# EAGLE board samd21g_board (EAGLE 9.6.2)
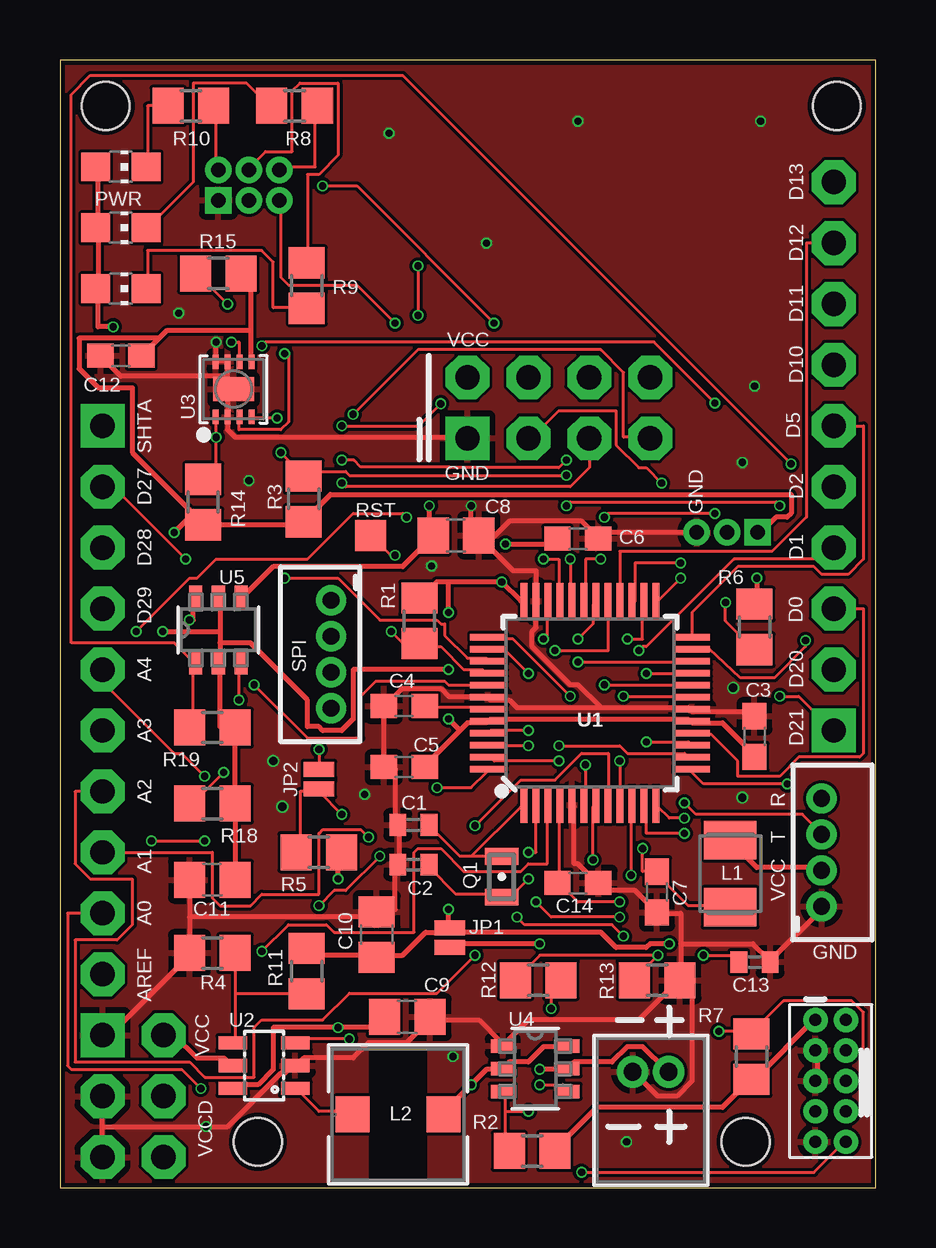
[diagram p0: board, top side]
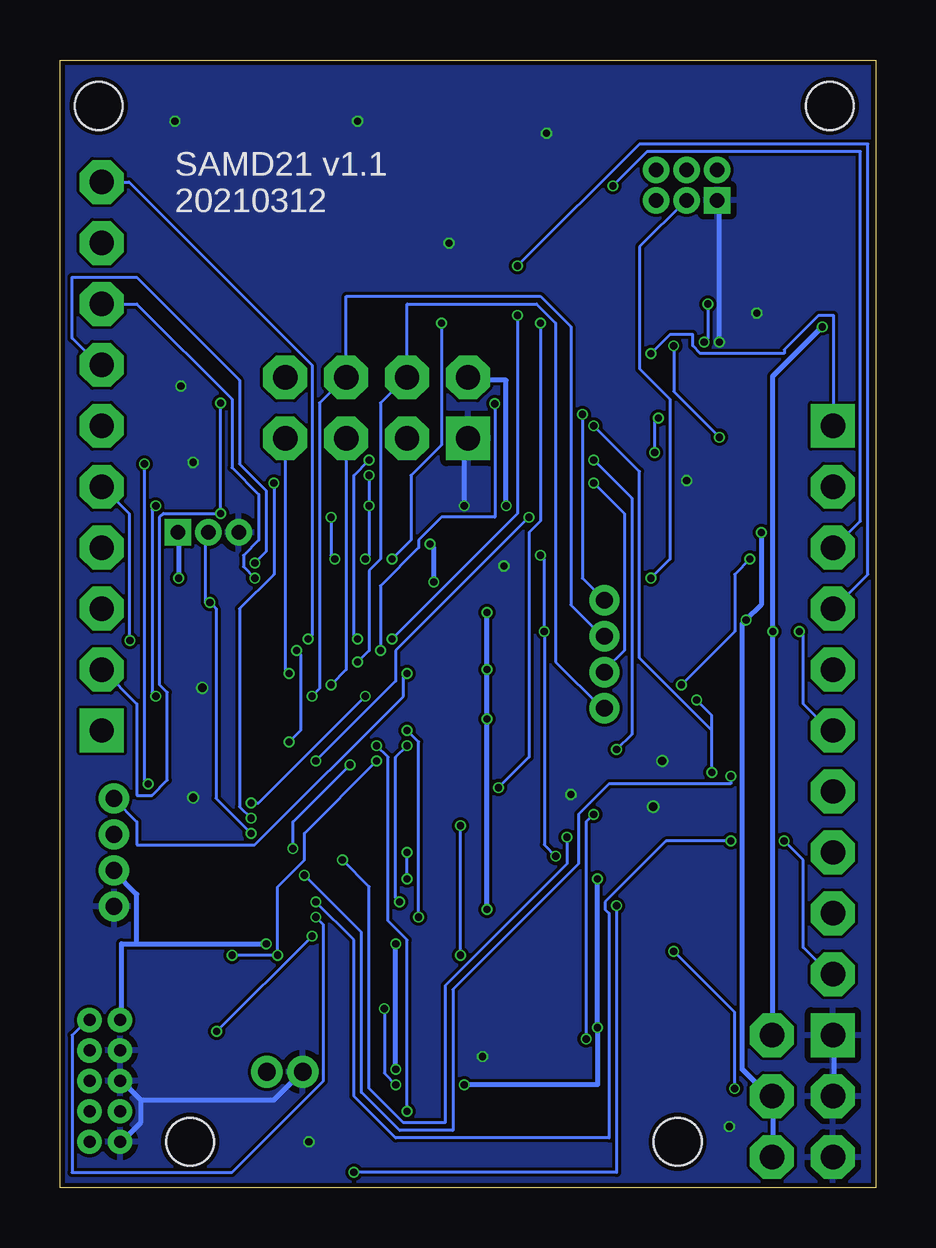
[diagram p1: board, bottom side, seen from below]

Size 34 x 47 mm. Coordinates in mm from the lower left corner, seen from the top.
Outline: 0,0 34,0 34,47 0,47 0,0
Copper layers (1*16): Top 0.035mm / dielectric 1.6mm / Bottom 0.035mm
Design rules "jlcpcb-2layers": minimum track width 5mil, minimum drill 0.3mm, track to track 5mil, track to pad 5mil, pad to pad 5mil, via to via 5mil, smd to smd 5mil, copper to edge 0.2mm, drill to drill 6mil, minimum pad ring 10mil, minimum via ring 3mil, stop-mask expansion 4mil, vias tented up to drill 0mil, thermal gap 10mil
Net classes: 1 vcc: width 0.203 mm
Holes 2 mm at 28.57,1.91 1.91,45.09 32.38,45.09 8.26,1.91
vRestrict: area 16.5,16.6 to 18.7,23.6; area 18.5,14.6 to 25.7,16.6; area 25.7,16.6 to 27.8,23.7; area 18.7,23.6 to 25.5,25.9; area 24.8,16.4 to 25.9,24.1; area 18.5,23.1 to 25.8,24; area 18.4,16.6 to 19.2,23.9; area 18.7,16.6 to 25.8,17.3; area 10.2,18.5 to 12.6,25.8; area 30.6,10.4 to 32.9,17.5; area 30.4,1.3 to 33.9,7.6; area 22.4,3.6 to 26.9,6.1; 6 more areas

## Footprints (pad centres in the part's own frame; a part is rotated, then mirrored left to right if it is on the bottom)
C0402 = smd 0.7 x 0.9: 1 -0.65,0; 2 0.65,0
C0603 = smd 1.1 x 1: 1 -0.85,0; 2 0.85,0
C0805 = smd 1.3 x 1.5: 1 -0.95,0; 2 0.95,0
2X5-PTH-1.27MM = drill 0.508 pad 1: 1 -2.54,-0.635; 2 -2.54,0.635; 3 -1.27,-0.635; 4 -1.27,0.635; 5 0,-0.635; 6 0,0.635; 7 1.27,-0.635; 8 1.27,0.635; 9 2.54,-0.635; 10 2.54,0.635
M_2R03_50MIL-V2 = drill 0.6 pad 1.05 square: 1 -1.27,-0.635 | drill 0.6 pad 1.05: 2 -1.27,0.635; 3 0,-0.635; 4 0,0.635; 5 1.27,-0.635; 6 1.27,0.635
2X04 = drill 1.016 square: 1 -3.81,-1.27 | drill 1.016 octagon: 2 -3.81,1.27; 3 -1.27,-1.27; 4 -1.27,1.27; 5 1.27,-1.27; 6 1.27,1.27; 7 3.81,-1.27; 8 3.81,1.27
M_1R03_50MIL-V = drill 0.6 pad 1.05 square: 1 -1.27,0 | drill 0.6 pad 1.05: 2 0,0; 3 1.27,0
B4B-ZR = drill 0.7 pad 1.1: 1 -2.25,0; 2 -0.75,0; 3 0.75,0; 4 2.25,0
2X03 = drill 1.016 square: 1 -2.54,-1.27 | drill 1.016 octagon: 2 -2.54,1.27; 3 0,-1.27; 4 0,1.27; 5 2.54,-1.27; 6 2.54,1.27
CONN_S2B-ZR_JST = drill 0.737 pad 1.245: 1 0,0; 2 1.499,0
SMT-JUMPER_2_NO_NO-SILK = smd 0.635 x 1.27: 1 -0.406,0; 2 0.406,0
1X10-S = drill 1.016 square: 1 -11.43,0 | drill 1.016 octagon: 2 -8.89,0; 3 -6.35,0; 4 -3.81,0; 5 -1.27,0; 6 1.27,0; 7 3.81,0; 8 6.35,0; 9 8.89,0; 10 11.43,0
L3225M = smd 1.6 x 2.2: 1 -1.4,0; 2 1.4,0
IND_CDRH3D16-4R7NC_SUM = smd 1.41 x 1.499: 1 -1.899,0; 2 1.899,0
CHIP-LED0805 = smd 1.2 x 1.2: A 0,-1.05; C 0,1.05
FC-12M = smd 0.7 x 1.4: 1 -0.85,0; 2 0.85,0
R0805 = smd 1.3 x 1.5: 1 -0.95,0; 2 0.95,0
TP13SQ = smd 1.3 x 1.3: TP 0,0
TQFP-48 = smd 1.5 x 0.28: 1 -4.25,2.75; 2 -4.25,2.25; 3 -4.25,1.75; 4 -4.25,1.25; 5 -4.25,0.75; 6 -4.25,0.25; 7 -4.25,-0.25; 8 -4.25,-0.75; 9 -4.25,-1.25; 10 -4.25,-1.75; 11 -4.25,-2.25; 12 -4.25,-2.75; 25 4.25,-2.75; 26 4.25,-2.25; 27 4.25,-1.75; 28 4.25,-1.25; 29 4.25,-0.75; 30 4.25,-0.25; 31 4.25,0.25; 32 4.25,0.75; 33 4.25,1.25; 34 4.25,1.75; 35 4.25,2.25; 36 4.25,2.75 | smd 0.28 x 1.5: 13 -2.75,-4.25; 14 -2.25,-4.25; 15 -1.75,-4.25; 16 -1.25,-4.25; 17 -0.75,-4.25; 18 -0.25,-4.25; 19 0.25,-4.25; 20 0.75,-4.25; 21 1.25,-4.25; 22 1.75,-4.25; 23 2.25,-4.25; 24 2.75,-4.25; 37 2.75,4.25; 38 2.25,4.25; 39 1.75,4.25; 40 1.25,4.25; 41 0.75,4.25; 42 0.25,4.25; 43 -0.25,4.25; 44 -0.75,4.25; 45 -1.25,4.25; 46 -1.75,4.25; 47 -2.25,4.25; 48 -2.75,4.25
SOT-23-6 = smd 0.55 x 1.2: 1 -0.95,-1.3; 2 0,-1.3; 3 0.95,-1.3; 4 0.95,1.3; 5 0,1.3; 6 -0.95,1.3
SHT3X_DFN8 = smd 0.6 x 0.25: 1 -1.15,0.75; 2 -1.15,0.25; 3 -1.15,-0.25; 4 -1.15,-0.75; 5 1.15,-0.75; 6 1.15,-0.25; 7 1.15,0.25; 8 1.15,0.75 | smd 1 x 1.7: THERMAL 0,0
TSOT23-6_419BL_ONS = smd 0.998 x 0.558: 1 -1.35,0.95; 2 -1.35,0; 3 -1.35,-0.95; 4 1.35,-0.95; 5 1.35,0; 6 1.35,0.95

## Placement (x,y rotation side)
C1  15pF  [C0402]  14.73,15.11 0 top
C2  15pF  [C0402]  14.73,13.46 0 top
C3  100nF  [C0603]  28.96,18.8 270 top
C4  100nF  [C0603]  14.35,20.07 0 top
C5  100nF  [C0603]  14.35,17.53 0 top
C6  100nF  [C0603]  21.59,27.05 180 top
C7  100nF  [C0603]  24.89,12.32 90 top
C8  10uF  [C0805]  16.51,27.18 180 top
C9  4.7uF  [C0805]  14.48,7.11 180 top
C10  10uF  [C0805]  13.21,10.54 90 top
C11  10uF  [C0805]  6.35,12.83 180 top
C12  100nF  [C0603]  2.54,34.67 180 top
C13  20pF  [C0402]  28.96,9.4 180 top
C14  100nF  [C0603]  21.59,12.7 180 top
H_CORTEX  CORTEX_JTAG_DEBUG_PTH  [2X5-PTH-1.27MM]  32.13,4.45 270 top
H_LEDS  [M_2R03_50MIL-V2]  7.87,41.78 0 top
H_NRF24  [2X04]  20.8,32.5 0 top
H_ONEWIRE  [M_1R03_50MIL-V]  27.81,27.3 180 top
H_SERIAL  B4B-ZR  [B4B-ZR]  31.75,13.97 90 top
H_SPI  B4B-ZR  [B4B-ZR]  11.3,22.23 270 top
H_VCC  [2X03]  3.05,3.81 270 top
H_VCC_INPUT  S2B-ZR  [CONN_S2B-ZR_JST]  23.88,4.83 0 top
JP1  JUMPER-SMT_2_NO_NO-SILK  [SMT-JUMPER_2_NO_NO-SILK]  16.26,10.41 90 top
JP2  JUMPER-SMT_2_NO_NO-SILK  [SMT-JUMPER_2_NO_NO-SILK]  10.79,17.02 90 top
JP3  [1X10-S]  32.26,30.48 90 top
JP4  [1X10-S]  1.78,20.32 270 top
L1  30R  [L3225M]  27.94,13.08 270 top
L2  4.7uH  [IND_CDRH3D16-4R7NC_SUM]  14.1,3.05 0 top
LED1  [CHIP-LED0805]  2.54,40.01 270 top
LED2  [CHIP-LED0805]  2.54,37.47 270 top
LED3  [CHIP-LED0805]  2.54,42.55 270 top
Q1  FC-12M  [FC-12M]  18.41,12.95 90 top
R1  10k  [R0805]  14.99,23.62 90 top
R2  1M  [R0805]  19.68,1.52 180 top
R3  10k  [R0805]  10.16,28.7 270 top
R4  1M  [R0805]  6.35,9.78 0 top
R5  1M  [R0805]  10.79,13.97 180 top
R6  4.7k  [R0805]  28.96,23.37 270 top
R7  1k  [R0805]  28.83,5.46 90 top
R8  10k  [R0805]  9.78,45.09 0 top
R9  10k  [R0805]  10.29,37.59 90 top
R10  10k  [R0805]  5.46,45.09 0 top
R11  1.5M  [R0805]  10.29,9.02 90 top
R12  100k  [R0805]  19.94,8.64 0 top
R13  100k  [R0805]  24.89,8.64 180 top
R14  10k  [R0805]  5.97,28.57 270 top
R15  10k  [R0805]  6.6,38.1 180 top
R18  10k  [R0805]  6.35,16 180 top
R19  10k  [R0805]  6.35,19.18 180 top
TP1  TPSQTP13SQ  [TP13SQ]  12.95,27.18 0 top
U1  ATSAMD21G-A  [TQFP-48]  22.1,20.19 90 top
U2  MCP16251/2  [SOT-23-6]  8.51,5.08 90 top
U3  SHT31/SHT35  [SHT3X_DFN8]  7.24,33.27 90 top
U4  FDC6306P  [TSOT23-6_419BL_ONS]  19.81,4.95 0 top
U5  FDC6306P  [TSOT23-6_419BL_ONS]  6.6,23.24 90 top

## Library data of the parts
C1 C2 = rcl; SOPL_MPN: GRM1555C1H150JA01D; SOPL_SKU: 302010041; SPICEPREFIX: C
C3-C7 C12 C14 = rcl; SOPL_MPN: CC0603KRX7R9BB104; SOPL_SKU: 302010138; SPICEPREFIX: C
C8 C10 C11 = rcl; SOPL_MPN: CC0805KKX5R8BB106; SOPL_SKU: 302010178; SPICEPREFIX: C
C9 C13 = rcl; SOPL_MPN: CC0805KKX5R8BB475; SOPL_SKU: 302010146; SPICEPREFIX: C
H_CORTEX = SparkFun-Connectors; SPICEPREFIX: X
H_LEDS H_NRF24 H_ONEWIRE H_VCC JP1-JP4 = common_used_objects
H_SERIAL H_SPI = con-jst; MF: FARNELL; MPN: B4B-ZR(LF)(SN); OC_FARNELL: 1830916; OC_NEWARK: 37K9960
H_VCC_INPUT = common_used_objects; BUILT_BY: EMA_Justin; COPYRIGHT: Copyright (C) 2018 Accelerated Designs. All rights reserved; DATASHEET: http://www.jst-mfg.com/product/pdf/eng/eZH.pdf; MANUFACTURER_PART_NUMBER: S2B-ZR(LF)(SN); SOURCELIBRARY: JST_2020-03-24; VENDOR: JST
L1 = rcl; SPICEPREFIX: L
L2 = common_used_objects; BUILT_BY: EMA_Cory; COPYRIGHT: Copyright (C) 2018 Accelerated Designs. All rights reserved; MANUFACTURER_PART_NUMBER: CDRH3D16/HPNP-4R7NC; SOPL_MPN: VLS201610HBX-4R7M-1; SOPL_SKU: 303010544; SOURCELIBRARY: Sumida_2020-01-16; VALUE_: 4.7uH; VENDOR: Sumida
LED1 = led; SOPL_MPN: 17-215SYGC/S530-E2/TR8; SOPL_SKU: 304090057
LED2 = led; SOPL_MPN: 17-215SURC/S530-A2/TR8; SOPL_SKU: 304090046
LED3 = led; SOPL_MPN: 17-215UYC/S530-A3/TR8; SOPL_SKU: 304090039
Q1 = crystal; SOPL_MPN: FC-12M; SOPL_SKU: 306010020
R1 R3 R8-R10 R14 R15 R18 R19 = rcl; SOPL_MPN: RC0805FR-0710KL; SOPL_SKU: 301010361; SPICEPREFIX: R
R2 R4 R5 R12 R13 = rcl; SOPL_MPN: RC0805FR-071ML; SOPL_SKU: 301012157; SPICEPREFIX: R
R6 = rcl; SOPL_MPN: RC0603FR-074K7L; SOPL_SKU: 301010195; SPICEPREFIX: R
R7 = rcl; SOPL_MPN: 301010311; SOPL_SKU: RC0805JR-071KL; SPICEPREFIX: R
R11 = rcl; SOPL_MPN: RC0805JR-071M5L; SPICEPREFIX: R; TME: SMD0805-1M5-1%
TP1 = testpad
U1 = common_used_objects; PROD_ID: IC-13064; SOPL_MPN: ATSAMD21G18A-MU; SOPL_SKU: 310010095
U2 = MCP16251-2
U3 = common_used_objects; SOPL_MPN: SHT35-DIS-B/SHT31-DIS-B
U4 U5 = common_used_objects; BUILT_BY: EMA_Cory; COPYRIGHT: Copyright (C) 2018 Accelerated Designs. All rights reserved; DATASHEET: https://www.onsemi.com/pub/Collateral/FDC6306P-D.pdf; MANUFACTURER_PART_NUMBER: FDC6306P; SOURCELIBRARY: Add_to_database_2020-12-23; VENDOR: ON Semiconductor

## Nets
A0: JP4.9 U1.3
A1: JP4.8 U1.7
A2: JP4.7 U1.8
A3: JP4.6 U1.9
A4: JP4.5 U1.10
A5_VBATT: C13.2 R12.1 R13.2 U1.47
AREF: C14.2 JP4.10 U1.4
D0: JP3.3 U1.16
D1: JP3.4 U1.15
D2: JP3.5 U1.23
D3_VBATT_EN: R2.2 U1.14 U4.3
D4_DEV_EN: R19.2 U1.13 U5.1
D5: JP3.6 U1.24
D6_NRF24_EN: R18.2 U1.29 U5.3
D7_BOOST_EN: JP2.2 U1.30
D8_ONEWIRE: H_ONEWIRE.2 R6.2 U1.11
D9_NRF_CE: H_NRF24.3 U1.12
D10: JP3.7 U1.27
D11: JP3.8 U1.25
D12: JP3.9 U1.28
D13: JP3.10 U1.26
D20_SDA: JP3.2 R14.1 U1.31 U3.1
D21_SCL: JP3.1 R3.1 U1.32 U3.4
D22_SPI_MISO: H_NRF24.7 H_SPI.1 U1.21
D23_SPI_MOSI: H_NRF24.6 H_SPI.2 U1.19
D24_SPI_SCK: H_NRF24.5 H_SPI.3 U1.20
D25_RX_LED: H_LEDS.5 U1.48
D26_TX_LED: H_LEDS.3 U1.39
D27_USB_HOST_ENABLE: JP4.2 U1.41
D28_USB_NEGATIVE: JP4.3 U1.33
D29_USB_POSITIVE: JP4.4 U1.34
D38_SPI_SSCSN: H_NRF24.4 H_SPI.4 U1.22
GND [vcc]: C1.1 C2.1 C3.1 C4.1 C5.1 C6.1 C7.1 C8.1 C9.1 C10.2 C11.2 C12.2 C13.1 C14.1 H_CORTEX.3 H_CORTEX.5 H_CORTEX.9 H_LEDS.1 H_NRF24.1 H_ONEWIRE.3 H_SERIAL.1 H_VCC.1 H_VCC.3 H_VCC.5 H_VCC_INPUT.1 R4.1 R13.1 U1.5 U1.18 U1.35 U1.42 U2.2 U3.2 U3.7 U3.8 U3.THERMAL U4.1
N$1: C1.2 Q1.2 U1.1
N$2: C2.2 Q1.1 U1.2
N$3: H_LEDS.4 R9.2
N$4: LED2.C R9.1
N$5: R15.2 U3.6
N$6: LED3.C R10.1
N$7: LED1.C R8.1
N$8: H_LEDS.6 R8.2
N$9: C7.2 L1.2 U1.6
N$10: JP2.1 R5.2 U2.3
N$11: R12.2 U4.4
N$12: H_LEDS.2 R10.2
N$13: R4.2 R11.1 U2.4
N$14: L2.1 U2.1
N$32: C4.2 U1.43
RESET: H_CORTEX.10 R1.1 TP1.TP U1.40
SERIAL_RXD: H_SERIAL.4 U1.38
SERIAL_TXD: H_SERIAL.3 U1.37
SHT_ALERT: JP4.1 U3.3
SWDCLK: H_CORTEX.4 R7.2 U1.45
SWDIO: H_CORTEX.2 U1.46
VCC [vcc]: C3.2 C5.2 C6.2 C10.1 C11.1 H_CORTEX.1 H_SERIAL.2 H_VCC.2 JP1.2 L1.1 LED1.A LED2.A LED3.A R1.2 R2.1 R7.1 R11.2 R18.1 R19.1 U1.17 U1.36 U1.44 U2.5 U5.2 U5.5
VCC_BATT [vcc]: C9.2 L2.2 R5.1 U2.6 U4.2 U4.6
VCC_DEVICES [vcc]: C12.1 H_ONEWIRE.1 H_VCC.4 H_VCC.6 R3.2 R6.1 R14.2 R15.1 U3.5 U5.6
VCC_INPUT [vcc]: H_VCC_INPUT.2 JP1.1 U4.5
VCC_NRF24 [vcc]: C8.2 H_NRF24.2 U5.4

## Tracks (layer width: path | path; a pad name or v marks a point on that pad's centre or on a via)
A0  (via drill 0.3)
  Top 0.127: v8.41,9.84 9.53,10.95 11.11,10.95 11.43,10.64 14.76,10.64 14.76,13.97 14.92,14.13 15.88,14.13 16.83,13.18 19.21,13.18 19.53,13.49 20.32,13.49 20.32,15.88 U1.3 | v5.87,4.13 5.08,4.92 0.48,4.92 0.32,5.08 0.32,11.43 JP4.9
  Bottom 0.127: v8.41,9.84 5.87,7.3 v5.87,4.13
A1  (via drill 0.3)
  Top 0.127: v22.23,13.65 22.23,15.88 U1.7 | v12.86,14.61 12.54,14.92 10.95,14.92 10.79,14.76 10.79,12.22 8.41,12.22 7.94,11.75 6.67,11.75 6.35,12.06 6.35,13.97 JP4.8
  Bottom 0.127: v22.23,13.65 21.11,12.54 21.11,4.13 19.68,2.7 17.94,2.7 17.94,8.41 12.86,13.49 v12.86,14.61
A2  (via drill 0.3)
  Top 0.127: v17.3,15.08 19.21,16.99 20.64,16.99 21.75,18.1 22.86,18.1 22.86,16.03 U1.8 | v17.3,9.68 15.72,8.1 12.06,8.1 10.95,6.99 8.41,6.99 8.1,6.67 8.1,4.6 6.03,4.6 5.4,5.24 0.64,5.24 0.64,10.32 2.38,10.32 3.02,10.95 3.02,12.86 1.27,12.86 0.64,13.49 0.64,16.51 JP4.7
  Bottom 0.127: v17.3,9.68 v17.3,15.08
A3  (via drill 0.3)
  Top 0.127: v23.34,17.78 23.34,16.03 U1.9 | v14.45,27.94 14.29,28.1 12.22,28.1 10.32,26.19 6.51,26.19 5.71,25.4 5.4,25.4 v3.17,23.18
  Bottom 0.127: v23.34,17.78 20,21.11 20,22.38 v14.45,27.94 | v3.17,23.18 3.02,23.02 3.02,20.16 1.91,19.05 JP4.6
A4  (via drill 0.3)
  Top 0.127: v23.81,13.02 23.81,15.88 U1.10 | v6.03,17.14 5.08,18.1 4.76,18.1 1.91,20.95 1.91,21.59 JP4.5
  Bottom 0.127: v23.81,13.02 21.43,10.64 21.43,3.97 19.84,2.38 17.62,2.38 17.62,8.26 12.38,13.49 12.38,15.56 11.11,16.83 6.03,16.83 v6.03,17.14
A5_VBATT  (via drill 0.3)
  Top 0.127: v26.83,9.68 28.1,9.68 28.26,9.53 C13.2 | R13.2 23.97,8.73 v24.92,9.68 20,9.68 19.05,8.73 R12.1 | v20.8,17.78 18.1,17.78 17.94,17.94 U1.47
  Bottom 0.127: v26.83,9.68 v24.92,9.68 24.92,12.54 23.81,13.65 23.81,14.76 v20.8,17.78
AREF  (via drill 0.3)
  Top 0.127: 20.8,12.7 20.8,15.88 U1.4 | 20.8,12.7 21.59,11.91 v23.34,11.91 | v3.81,14.45 v6.03,14.45 | 20.8,12.7 C14.2
  Bottom 0.127: v23.34,11.91 21.75,10.32 21.75,3.81 20,2.06 11.11,2.06 11.11,11.43 11.27,11.59 11.27,11.91 8.73,14.45 v6.03,14.45 | v3.81,14.45 3.02,13.65 3.02,10 1.91,8.89 JP4.10
D0
  Top 0.127: JP3.3 33.5,24.13 33.5,18.1 33.34,17.94 30.8,17.94 30,17.14 28.26,17.14 28.26,17.78 27.15,18.89 26.35,18.89 U1.16
D1  (via drill 0.3)
  Top 0.127: v24.45,18.57 26.19,18.57 U1.15 | v24.13,22.38 24.29,22.54 24.45,22.54 28.1,26.19 31.75,26.19 32.23,26.67 JP3.4
  Bottom 0.127: v24.45,18.57 23.97,19.05 23.97,22.23 v24.13,22.38
D2  (via drill 0.3)
  Top 0.127: v31.08,22.8 31.08,22.54 29.78,21.24 28.37,21.24 27.08,22.44 U1.23
  Bottom 0.127: v31.08,22.8 31.11,22.8 31.11,28.1 32.23,29.21 JP3.5
D3_VBATT_EN  (via drill 0.3)
  Top 0.127: 18.57,3.17 18.57,1.59 18.73,1.59 R2.2 | 18.57,3.17 18.57,3.97 U4.3 | v20.8,18.41 23.34,18.41 23.65,18.1 26.04,18.1 26.19,17.94 U1.14 | 18.57,3.17 v19.53,3.17
  Bottom 0.127: v20.8,18.41 20.32,17.94 20.32,11.11 19.53,10.32 v19.53,3.17
D4_DEV_EN  (via drill 0.3)
  Top 0.127: R19.2 5.56,19.21 5.56,21.75 U5.1 5.56,21.91 4.76,22.7 0.48,22.7 0.48,45.56 1.27,46.35 14.29,46.35 v30.48,30.16 | v30.32,16.83 26.83,16.83 26.35,17.3 U1.13
  Bottom 0.127: v30.32,16.83 30.48,16.99 v30.48,30.16
D5
  Top 0.127: JP3.6 33.5,31.75 33.5,26.19 32.86,25.56 31.75,25.56 31.43,25.88 28.26,25.88 26.35,23.97 26.35,23.02 U1.24
D6_NRF24_EN  (via drill 0.3)
  Top 0.127: v7.46,20.32 7.46,21.75 U5.3 | v6.83,17.3 5.56,16.03 R18.2 | v20.64,22.38 22.86,22.38 22.86,24.29 U1.29 | v15.88,32.67 14.95,31.75 v11.75,31.75
  Bottom 0.127: v7.46,20.32 6.83,19.68 6.83,19.05 | v6.83,17.3 6.83,19.05 | v20.64,22.38 20.64,25.08 19.05,26.67 19.05,26.99 18.1,27.94 15.88,27.94 v15.88,32.67 | v11.75,31.75 9.84,29.84 9.84,22.07 6.83,19.05
D7_BOOST_EN  (via drill 0.3)
  Top 0.127: v10.79,18.26 JP2.2 | v11.75,30.32 12.26,30.32 12.54,30.04 16.22,30.04 16.26,30 20.8,30 v21.11,30.32 | v21.59,22.86 22.23,23.5 22.23,24.29 U1.30
  Bottom 0.127: v10.79,18.26 10.16,18.89 10.16,28.73 v11.75,30.32 | v21.11,30.32 21.75,29.69 21.75,23.02 v21.59,22.86
D8_ONEWIRE  (via drill 0.3)
  Top 0.127: R6.2 27.75,23.62 v27.75,24.38 | v26.04,14.76 24.45,14.76 24.45,15.88 U1.11
  Bottom 0.127: H_ONEWIRE.2 27.94,27.3 27.94,24.38 v27.75,24.38 27.5,24.13 27.5,16.22 v26.04,14.76
D9_NRF_CE  (via drill 0.3)
  Top 0.127: v26.04,15.4 25.4,15.4 24.92,15.88 U1.12 | v25.08,29.37 24.45,30 24.13,30 23.18,30.96 23.18,32.38 20.8,32.38 19.68,31.27 H_NRF24.3
  Bottom 0.127: v26.04,15.4 26.51,15.88 26.51,24.13 25.08,25.56 v25.08,29.37
D10  (via drill 0.3)
  Top 0.127: v25.88,26.04 23.97,26.04 23.97,24.45 U1.27
  Bottom 0.127: v25.88,26.04 25.4,26.51 25.4,29.05 26.51,30.16 26.51,33.66 30.8,37.94 33.5,37.94 33.5,35.4 32.38,34.29 JP3.7
D11  (via drill 0.3)
  Top 0.127: v25.88,25.4 24.92,24.45 U1.25
  Bottom 0.127: v25.88,25.4 26.35,25.88 26.35,26.35 25.72,26.99 25.72,28.89 26.83,30 26.83,32.86 30.8,36.83 JP3.8
D12
  Top 0.127: JP3.9 31.11,39.37 31.11,27.94 29.69,26.51 23.34,26.51 23.34,24.45 U1.28
D13  (via drill 0.3)
  Top 0.127: v23.65,22.86 24.29,22.86 24.29,24.29 U1.26
  Bottom 0.127: v23.65,22.86 23.5,23.02 23.5,34.29 31.11,41.91 JP3.10
D20_SDA  (via drill 0.3)
  Top 0.127: U3.1 6.51,32.07 v6.51,31.27 6.51,29.53 6.03,29.53 R14.1 | v22.54,26.19 21.91,26.19 21.91,24.45 U1.31 | v22.7,27.94 22.86,28.1 v27.3,28.1 | v8.41,35.08 8.57,35.24 24.77,35.24 v27.3,32.7
  Bottom 0.127: v22.54,26.19 22.7,26.35 v22.7,27.94 | JP3.2 32.23,21.59 30.8,20.16 30.8,16.35 30.16,16.35 29.53,16.99 29.53,20.64 29.84,20.95 29.84,27.94 29.69,28.1 v27.3,28.1 v27.3,32.7 | v6.51,31.27 8.41,33.18 v8.41,35.08
D21_SCL  (via drill 0.3)
  Top 0.127: v9.05,32.07 8.1,32.07 U3.4 | 10,29.84 10.16,29.69 R3.1 10,29.84 | 10,29.84 v9.21,30.64 | v21.27,26.19 21.27,24.45 U1.32 | v21.11,29.69 12.06,29.69 11.91,29.84 10,29.84 | v30,20.48 30.8,20.48 32.23,19.05 JP3.1 | v30,28.42 29.84,28.57 21.27,28.57 v21.11,28.42
  Bottom 0.127: v9.05,32.07 9.21,31.91 v9.21,30.64 | v21.27,26.19 21.11,26.35 v21.11,28.42 v21.11,29.69 | v30,20.48 30.16,20.64 30.16,28.26 v30,28.42
D22_SPI_MISO  (via drill 0.3)
  Top 0.127: v24.45,21.43 26.19,21.43 U1.21 | v12.22,32.23 14.92,34.92 22.54,34.92 23.5,33.97 23.5,31.27 24.61,31.27 H_NRF24.7
  Bottom 0.127: v24.45,21.43 24.61,21.59 24.61,31.11 H_NRF24.7 | v12.22,32.23 12.22,25.4 11.43,24.61 H_SPI.1
D23_SPI_MOSI  (via drill 0.3)
  Top 0.127: v23.5,20.48 26.19,20.48 U1.19
  Bottom 0.127: v23.5,20.48 23.18,20.8 23.18,32.7 22.23,33.66 H_NRF24.6 22.07,33.81 22.07,37.15 13.97,37.15 12.7,35.88 12.7,24.29 11.43,23.02 H_SPI.2
D24_SPI_SCK  (via drill 0.3)
  Top 0.127: v22.7,20.95 26.19,20.95 U1.20 | v11.75,29.37 11.91,29.21 21.27,29.21 22.07,30 22.07,31.11 H_NRF24.5
  Bottom 0.127: v22.7,20.95 22.07,21.59 22.07,31.11 H_NRF24.5 | v11.75,29.37 10.48,28.1 10.48,22.38 11.27,21.59 H_SPI.3
D25_RX_LED  (via drill 0.3)
  Top 0.127: v15.72,16.67 17.14,16.67 17.78,17.3 U1.48 | v13.97,36.04 12.38,37.62 9.53,37.62 9.21,37.94 9.21,41.12 H_LEDS.5
  Bottom 0.127: v15.72,16.67 14.45,17.94 14.45,27.3 13.97,27.78 v13.97,36.04
D26_TX_LED  (via drill 0.3)
  Top 0.127: v9.37,25.4 11.59,25.4 13.34,23.65 15.72,23.65 15.88,23.5 16.03,23.5 16.03,23.02 16.99,22.07 17.78,22.07 U1.39
  Bottom 0.127: v9.37,25.4 8.57,26.19 8.57,32.86 9.84,34.13 9.84,39.21 7.94,41.12 H_LEDS.3
D27_USB_HOST_ENABLE  (via drill 0.3)
  Top 0.127: v8.1,20.95 10.32,18.73 12.54,18.73 12.54,20.48 13.18,21.11 16.03,21.11 16.19,20.95 17.78,20.95 U1.41 | v5.24,26.19 2.22,29.21 JP4.2
  Bottom 0.127: v8.1,20.95 5.87,23.18 5.87,25.56 v5.24,26.19
D28_USB_NEGATIVE  (via drill 0.3)
  Top 0.127: v20.16,26.19 20.8,26.19 20.8,24.45 U1.33 | v18.1,36.04 12.38,41.75 v10.95,41.75
  Bottom 0.127: v20.16,26.19 19.37,26.99 19.37,29.69 18.1,30.96 v18.1,36.04 | v10.95,41.75 9.53,43.18 0.64,43.18 0.64,27.78 1.75,26.67 JP4.3
D29_USB_POSITIVE  (via drill 0.3)
  Top 0.127: v20.16,22.86 20.32,22.86 20.32,24.29 U1.34 | v14.92,38.42 v14.92,36.35
  Bottom 0.127: v20.16,22.86 14.92,28.1 v14.92,36.35 | v14.92,38.42 9.84,43.5 0.32,43.5 0.32,25.56 1.75,24.13 JP4.4
D38_SPI_SSCSN  (via drill 0.3)
  Top 0.127: v21.59,21.91 26.19,21.91 U1.22
  Bottom 0.127: v21.59,21.91 21.11,22.38 21.11,25.72 20.64,26.19 20.64,32.7 19.68,33.66 H_NRF24.4 19.53,33.81 19.53,36.83 14.13,36.83 13.34,36.04 13.34,21.91 11.43,20 H_SPI.4
GND  (via drill 0.3, 0.35)
  Top 0.203: H_CORTEX.3 31.59,5.71 31.59,4.45 H_CORTEX.5 | H_SERIAL.1 31.75,11.59 29.69,9.53 C13.1 29.53,9.53 28.89,10.16 25.88,10.16 | 25.88,10.16 25.88,11.43 24.92,11.43 C7.1 24.77,11.59 23.97,12.38 22.86,12.38 22.54,12.7 C14.1 22.38,12.7 21.59,13.49 21.43,13.49 21.43,15.88 U1.5 | 25.88,10.16 25.88,8.73 R13.1 | R13.1 25.72,8.57 24.13,6.99 19.53,6.99 18.57,6.03 U4.1 18.41,6.03 17.46,6.99 15.56,6.99 C9.1 15.4,6.99 14.45,6.03 12.86,6.03 12.22,5.4 10.16,5.4 9.84,5.08 U2.2 9.68,5.08 9.37,4.76 9.21,4.76 6.99,2.54 v6.1,2.54 1.75,2.54 | H_VCC_INPUT.1 23.97,4.76 24.92,3.81 25.72,3.81 26.35,4.45 26.35,8.57 25.88,8.57 R13.1 | 6.51,34.45 6.99,34.45 U3.7 6.99,34.29 6.99,33.81 | 6.99,33.81 6.99,33.34 7.14,33.34 U3.THERMAL 7.14,33.18 6.99,33.18 6.99,32.23 U3.2 6.99,32.07 6.99,31.59 7.3,31.27 16.99,31.27 H_NRF24.1 | 6.99,33.81 2.54,33.81 1.75,34.61 C12.2 | 6.51,34.45 v6.51,35.24 | 6.51,34.45 U3.8 | 1.75,2.54 1.75,3.81 H_VCC.3 | 1.75,2.54 1.75,1.27 H_VCC.5 | 5.4,11.27 5.4,12.7 C11.2 | 5.4,11.27 5.4,9.84 R4.1 5.4,9.68 2.06,6.35 H_VCC.1 | 17.78,26.83 17.46,27.15 C8.1 | 17.78,26.83 18.89,25.72 19.84,25.72 U1.35 19.84,24.29 19.84,23.34 19.68,23.18 19.68,22.54 21.27,20.95 21.59,20.95 22.54,20 | H_ONEWIRE.3 22.7,27.3 22.54,27.15 C6.1 22.38,27.15 21.75,27.78 18.73,27.78 17.78,26.83 | 17.78,26.83 C8.1 | C3.1 28.89,19.68 28.73,19.84 26.35,19.84 U1.18 26.19,20 22.54,20 | 22.54,20 19.05,20 18.73,20.32 17.94,20.32 U1.42 17.78,20.48 16.19,20.48 15.88,20.8 14.29,20.8 13.65,20.16 C4.1 13.49,20 13.49,17.62 C5.1 13.65,17.46 13.97,17.46 13.97,15.24 C1.1 14.13,15.08 14.13,13.49 C2.1 13.97,13.34 13.97,11.59 13.34,11.59 C10.2 13.18,11.43 13.02,11.27 5.4,11.27
  Top 0.203: v17.14,28.42 17.14,27.3 17.3,27.3 C8.1
  Bottom 0.203: 30.64,3.65 30.64,2.7 31.43,1.91 H_CORTEX.9 | 30.64,3.65 31.43,4.45 H_CORTEX.5 | 30.64,3.65 25.08,3.65 23.97,4.76 H_VCC_INPUT.1 | v6.51,35.24 6.51,41.12 H_LEDS.1 | H_VCC.3 1.75,3.81 1.75,6.35 H_VCC.1 | v17.14,28.42 17.14,31.11 H_NRF24.1
  other vias: 28.96,33.4 29.21,44.45 13.72,43.94 17.78,39.37 21.59,44.45 28.45,30.23 4.95,36.45 23.62,1.91 16.38,5.46 12.7,16.38 15.49,25.91 7.87,29.46 28.45,16.26 9.27,15.88 8.89,17.78 28.07,20.83
  pour Top: 0,0 34.04,0 34.04,46.99 0,46.99
  pour Bottom: 0,0 34.04,0 34.04,46.99 0,46.99
N$1
  Top 0.127: 17.14,13.81 Q1.2 | 17.14,13.81 16.67,13.81 15.4,15.08 C1.2 | 17.14,13.81 19.21,15.88 U1.1
N$2  (via drill 0.3)
  Top 0.127: 18.41,12.22 16.51,12.22 15.4,13.34 C2.2 | v19.53,13.97 19.84,13.97 19.84,15.88 U1.2 | v19.53,12.86 18.89,12.22 18.41,12.22 | 18.41,12.22 Q1.1
  Bottom 0.127: v19.53,12.86 v19.53,13.97
N$3
  Top 0.127: R9.2 10.32,38.58 10.32,42.23 10.79,42.23 11.59,43.02 11.59,46.04 10,46.04 9.68,45.72 9.68,43.18 8.57,43.18 7.94,42.55 H_LEDS.4
N$4
  Top 0.127: LED2.C 3.65,37.47 3.65,39.05 8.41,39.05 8.89,38.58 8.89,36.67 10.16,36.67 R9.1
N$5  (via drill 0.3)
  Top 0.127: v7.14,35.24 7.46,35.24 7.46,34.45 U3.6 | v6.99,36.83 5.71,38.1 R15.2
  Bottom 0.127: v7.14,35.24 6.99,35.4 v6.99,36.83
N$6
  Top 0.127: R10.1 3.65,45.09 3.65,42.55 LED3.C
N$7
  Top 0.127: LED1.C 3.65,40.01 5.56,41.91 5.56,46.04 7.78,46.04 8.73,45.09 R8.1
N$8
  Top 0.127: R8.2 10.64,45.09 10.64,42.55 9.21,42.55 H_LEDS.6
N$9  (via drill 0.3)
  Top 0.127: L1.2 27.94,11.75 26.19,11.75 24.92,13.02 C7.2 24.77,13.18 24.29,13.18 v24.29,14.13 | v21.91,17.62 21.91,16.03 U1.6
  Bottom 0.127: v21.91,17.62 24.29,15.24 v24.29,14.13
N$10  (via drill 0.3)
  Top 0.127: v12.06,6.19 10,6.19 9.84,6.03 U2.3 | 10.79,16.51 v11.75,15.56 | 10.79,16.51 10,16.51 10,13.97 R5.2 | 10.79,16.51 JP2.1
  Bottom 0.127: v12.06,6.19 12.06,15.24 v11.75,15.56
N$11  (via drill 0.3)
  Top 0.127: v20,4.29 20.95,4.29 21.11,4.13 U4.4 | v20.48,7.46 20.48,8.57 20.8,8.57 R12.2
  Bottom 0.127: v20,4.29 20.48,4.76 v20.48,7.46
N$12
  Top 0.127: R10.2 6.51,45.09 6.51,42.55 H_LEDS.2
N$13
  Top 0.127: 7.3,8.1 7.3,9.68 R4.2 | 7.3,8.1 7.3,6.03 U2.4 | 7.3,8.1 10.16,8.1 R11.1
N$14
  Top 0.127: U2.1 9.84,4.13 10.79,3.17 12.06,3.17 L2.1
N$32
  Top 0.127: C4.2 15.24,20 17.78,20 U1.43
RESET  (via drill 0.3)
  Top 0.127: v13.97,26.35 13.81,26.35 13.02,27.15 TP1.TP | v13.81,23.18 14.29,22.7 14.92,22.7 R1.1 15.08,22.54 15.88,22.54 16.83,21.59 17.62,21.59 17.78,21.43 U1.40 | v21.75,0.64 31.43,0.64 32.7,1.91 H_CORTEX.10 | v10.79,11.75 11.43,12.38 11.91,12.38 v13.34,13.81
  Bottom 0.127: v13.97,26.35 13.81,26.19 v13.81,23.18 13.81,14.29 v13.34,13.81 | v21.75,0.64 10.79,0.64 v10.79,11.75
SERIAL_RXD  (via drill 0.3)
  Top 0.127: v19.53,21.43 18.57,22.38 17.94,22.38 U1.38
  Bottom 0.127: v19.53,21.43 19.68,21.27 19.68,20.48 25.88,14.29 30.8,14.29 30.8,15.24 31.75,16.19 H_SERIAL.4
SERIAL_TXD  (via drill 0.3)
  Top 0.127: v21.27,20.48 18.89,22.86 17.94,22.86 U1.37 | v26.04,16.03 26.51,15.56 30.96,15.56 31.75,14.76 H_SERIAL.3
  Bottom 0.127: v21.27,20.48 25.72,16.03 v26.04,16.03
SHT_ALERT  (via drill 0.3)
  Top 0.127: v9.37,34.77 9.53,34.77 9.53,31.91 9.21,31.59 7.46,31.59 7.46,32.07 U3.3
  Bottom 0.127: v9.37,34.77 8.57,35.56 7.62,35.56 7.62,35.08 7.3,34.77 3.81,34.77 3.81,34.92 2.38,36.35 1.75,36.35 1.75,31.75 JP4.1
SWDCLK  (via drill 0.3)
  Top 0.127: H_CORTEX.4 33.5,5.71 33.5,7.3 33.02,7.78 30.16,7.78 28.89,6.51 R7.2 28.73,6.51 v27.46,6.51 | v19.53,19.05 17.94,19.05 U1.45 | v19.05,11.27 19.37,10.95 23.02,10.95 v23.5,10.48
  Bottom 0.127: v19.53,19.05 19.05,18.57 v19.05,11.27 | v27.46,6.51 v23.5,10.48
SWDIO  (via drill 0.3)
  Top 0.127: v19.53,18.41 17.94,18.41 U1.46 | v19.84,11.91 20.48,11.27 v23.34,11.27
  Bottom 0.127: v19.53,18.41 20,17.94 20,12.06 v19.84,11.91 | v23.34,11.27 23.02,10.95 23.02,4.45 26.83,0.64 33.5,0.64 33.5,6.35 32.86,6.99 H_CORTEX.2
VCC  (via drill 0.3)
  Top 0.203: 6.67,23.18 6.67,24.45 U5.5 | 6.67,23.18 6.67,22.7 | 6.67,22.7 6.67,21.91 U5.2 6.67,21.75 6.67,19.21 7.14,19.21 R19.1 7.3,19.05 7.3,16.03 R18.1 7.3,15.88 7.3,12.86 C11.1 | 1.59,40.01 1.59,37.47 | 1.59,40.01 1.59,42.55 LED3.A | 1.59,40.01 LED1.A | H_VCC.2 4.76,6.35 5.71,5.4 6.83,5.4 7.14,5.08 U2.5 | 1.59,37.47 1.59,35.88 v2.22,35.88 | 1.59,37.47 LED2.A | v4.29,23.18 6.67,23.18 | v18.57,26.83 20.48,26.83 20.64,26.99 C6.2 | U1.36 19.21,24.45 v18.41,25.24 16.19,25.24 | 16.19,25.24 15.72,25.24 15.08,24.61 R1.2 | C3.2 28.89,18.1 27.62,19.37 26.35,19.37 U1.17 26.19,19.53 17.94,19.53 U1.44 17.78,19.37 16.99,19.37 16.67,19.05 | 16.67,19.05 15.24,17.62 C5.2 | v16.19,23.97 16.19,25.24 | 16.67,19.05 v16.19,19.53 | L1.1 27.94,14.45 29.05,13.34 31.75,13.34 H_SERIAL.2 | JP1.2 16.19,10.79 16.03,10.64 15.24,10.64 14.29,9.68 13.34,9.68 C10.1 13.18,9.68 10.48,9.68 10.32,9.84 R11.2 | R2.1 20.64,1.59 22.38,3.33 27.62,3.33 28.73,4.45 R7.1 28.89,4.6 29.05,4.6 31.43,6.99 H_CORTEX.1 | v25.4,10.16 24.61,10.16 24.45,10 23.18,10 22.54,10.64 16.51,10.64 16.35,10.79 JP1.2 | v16.19,11.59 16.19,10.95 JP1.2 | 6.67,22.7 7.94,22.7 10.32,20.32 10.32,19.21 10.79,19.21 10.95,19.05 11.75,19.05 12.22,19.53 12.22,21.59 v16.19,21.59
  Bottom 0.203: v2.22,35.88 4.29,33.81 v4.29,23.18 4.29,6.35 H_VCC.2 | v18.57,26.83 18.41,26.67 v18.41,25.24 | v16.19,23.97 v16.19,21.59 v16.19,19.53 v16.19,11.59 | 30.8,10.16 31.43,10.16 31.43,6.99 H_CORTEX.1 | 30.8,10.16 v25.4,10.16 | 30.8,10.16 30.8,12.22 31.75,13.18 H_SERIAL.2
VCC_BATT  (via drill 0.3)
  Top 0.203: U4.6 21.11,5.87 20.16,5.87 19.53,5.24 18.73,5.24 18.57,5.08 U4.2 18.41,4.92 17.78,4.92 v17.14,4.29 16.03,3.17 L2.2 | U2.6 7.3,4.29 8.26,4.29 8.89,4.92 8.89,6.67 v11.59,6.67 13.18,6.67 13.49,6.99 C9.2 | v11.59,12.86 11.59,13.97 R5.1
  Bottom 0.203: v11.59,12.86 v11.59,6.67 11.59,4.29 v17.14,4.29
VCC_DEVICES  (via drill 0.3)
  Top 0.203: v5.4,23.65 5.56,23.65 5.56,24.45 U5.6 | v29.05,25.4 29.05,24.32 R6.1 | R14.2 6.03,27.62 10.16,27.62 R3.2 10.16,27.78 11.27,28.89 30.48,28.89 30.48,28.1 30.32,27.94 29.84,27.94 29.21,27.3 H_ONEWIRE.1 | 7.94,35.72 7.94,38.1 R15.1 | 7.94,35.72 7.94,34.45 U3.5 | 4.13,35.4 4.45,35.72 7.94,35.72 | 4.13,35.4 3.49,34.77 C12.1 | 5.56,28.1 3.02,30.64 3.02,33.34 1.59,33.34 0.79,34.13 0.79,35.4 4.13,35.4 | 5.56,28.1 5.87,27.78 R14.2 | 5.56,28.1 v4.76,27.3 | 5.56,28.1 R14.2
  Bottom 0.203: H_VCC.6 4.29,1.27 4.29,3.81 H_VCC.4 4.45,3.81 5.56,4.92 5.56,23.5 v5.4,23.65 4.76,24.29 v4.76,27.3 | v29.05,25.4 29.05,27.3 H_ONEWIRE.1
VCC_INPUT  (via drill 0.3)
  Top 0.203: H_VCC_INPUT.2 25.24,4.92 24.29,5.87 23.65,5.87 23.02,5.24 21.43,5.24 21.27,5.08 U4.5 21.11,4.92 v20,4.92 | v20,10.16 16.35,10.16 JP1.1
  Bottom 0.203: v20,4.92 v20,10.16
VCC_NRF24  (via drill 0.3)
  Top 0.203: U5.4 7.62,24.61 8.89,25.88 14.29,25.88 15.56,27.15 C8.2 15.56,27.3 15.4,27.3 v15.4,28.42
  Bottom 0.203: v15.4,28.42 15.4,33.66 16.99,33.66 H_NRF24.2

## Text on the board
tPlace: D13 | D12 | D11 | D10 | D5 | D2 | RST | D1 | D0 | D20 | R | T | VCC | GND
tNames: PWR | VCC | SHTA | GND | D27 | GND | D28 | D29 | SPI | A4 | A3 | D21 | A2 | A1 | A0 | AREF | VCC | VCCD
bNames: SAMD21 v1.1 / 20210312